# Altium PCB PCB1.PcbDoc
Units mm, origin at the board's own origin, x right, y up, seen from the top; angles counter-clockwise.
Board outline 49.6 x 17.59 mm, 4 copper layers (Top Layer, Layer 1, Layer 2, Bottom Layer), stack 0.127 mm thick; 1 components, 1 nets, 2 pads, 3 vias.
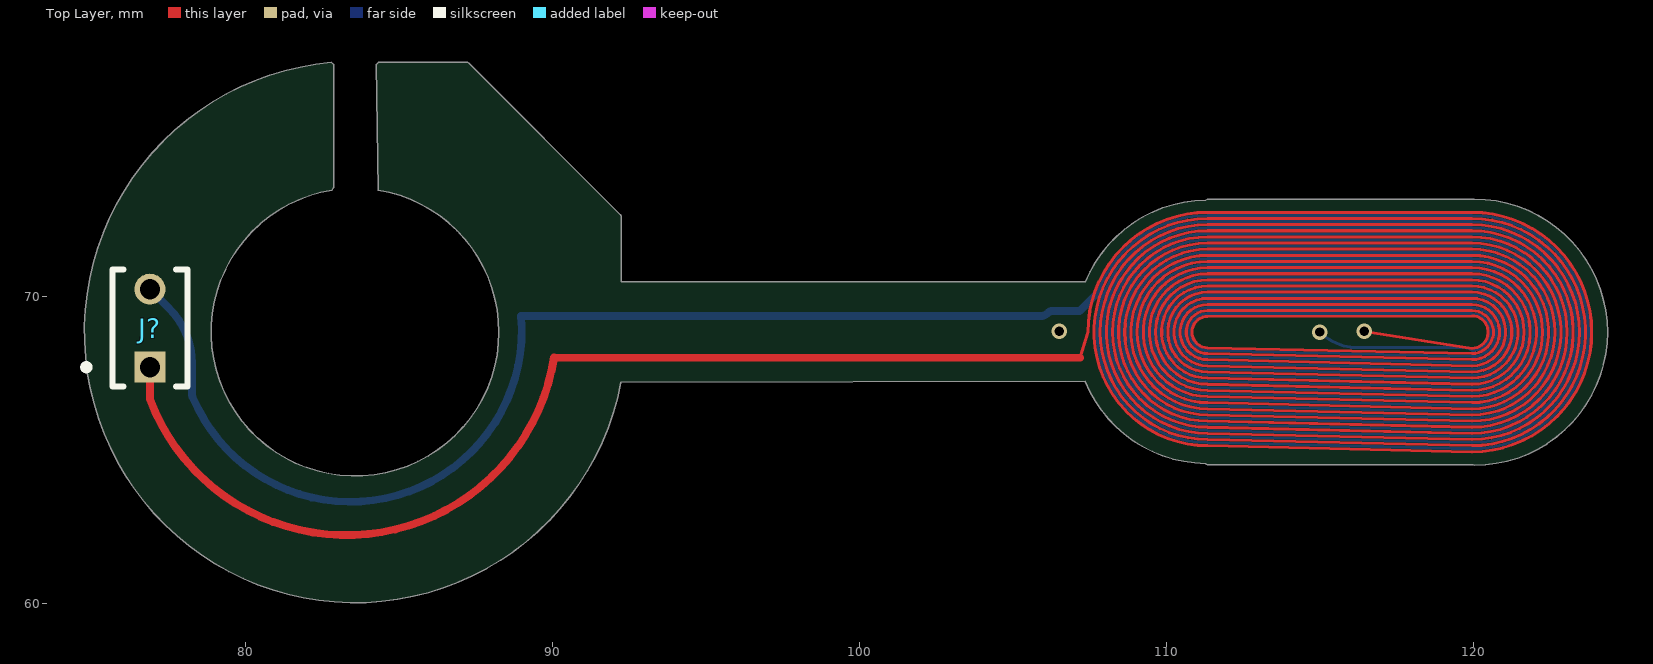
[diagram p0: Top Layer view]
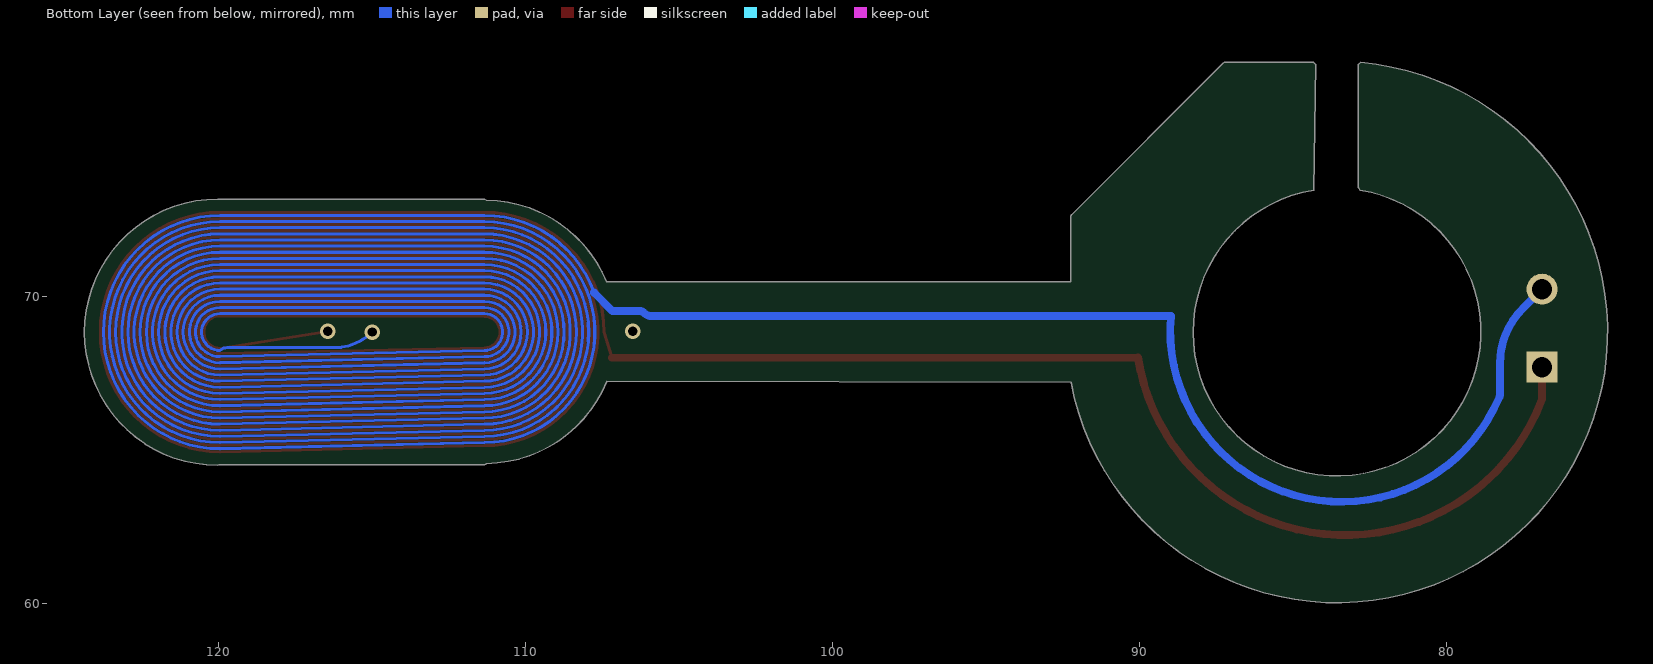
[diagram p1: Bottom Layer view, seen from below]
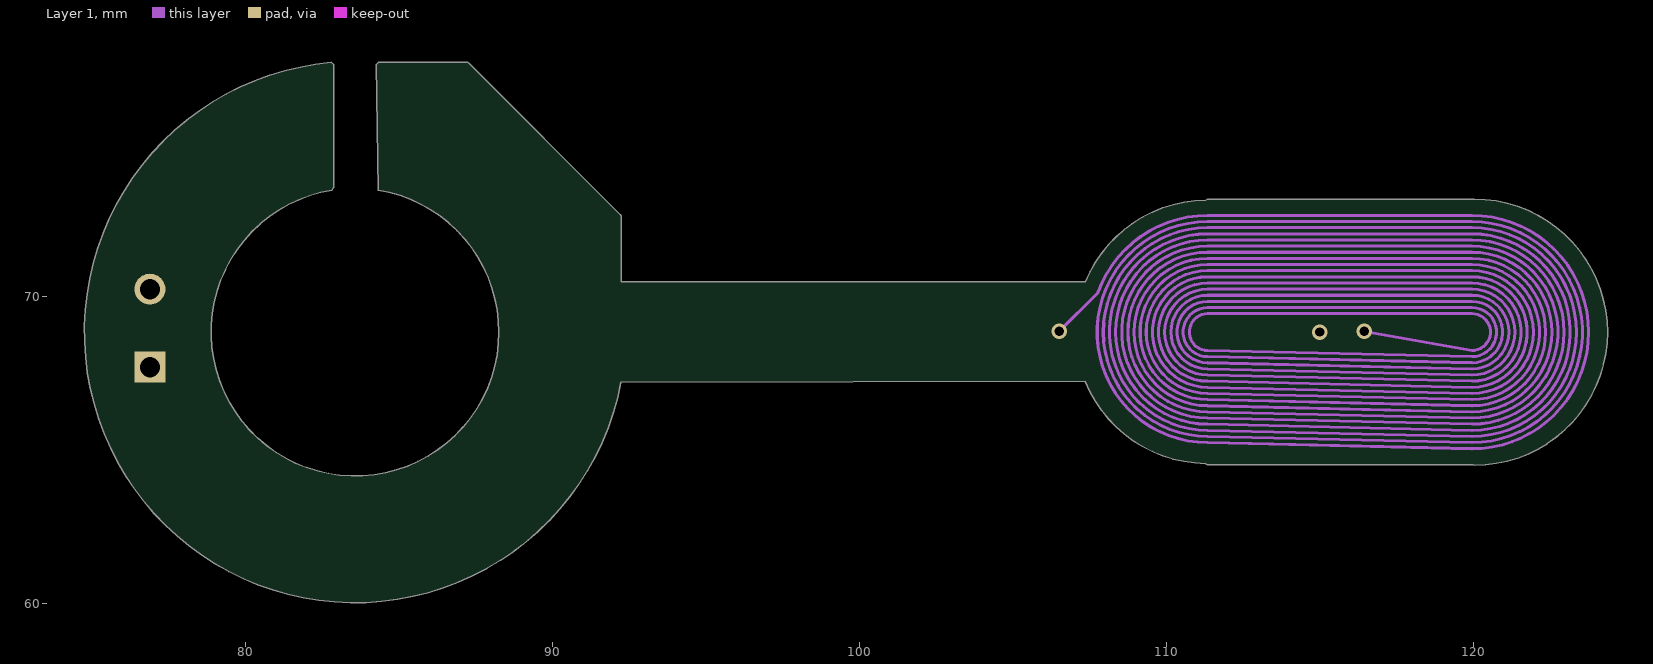
[diagram p2: Layer 1]
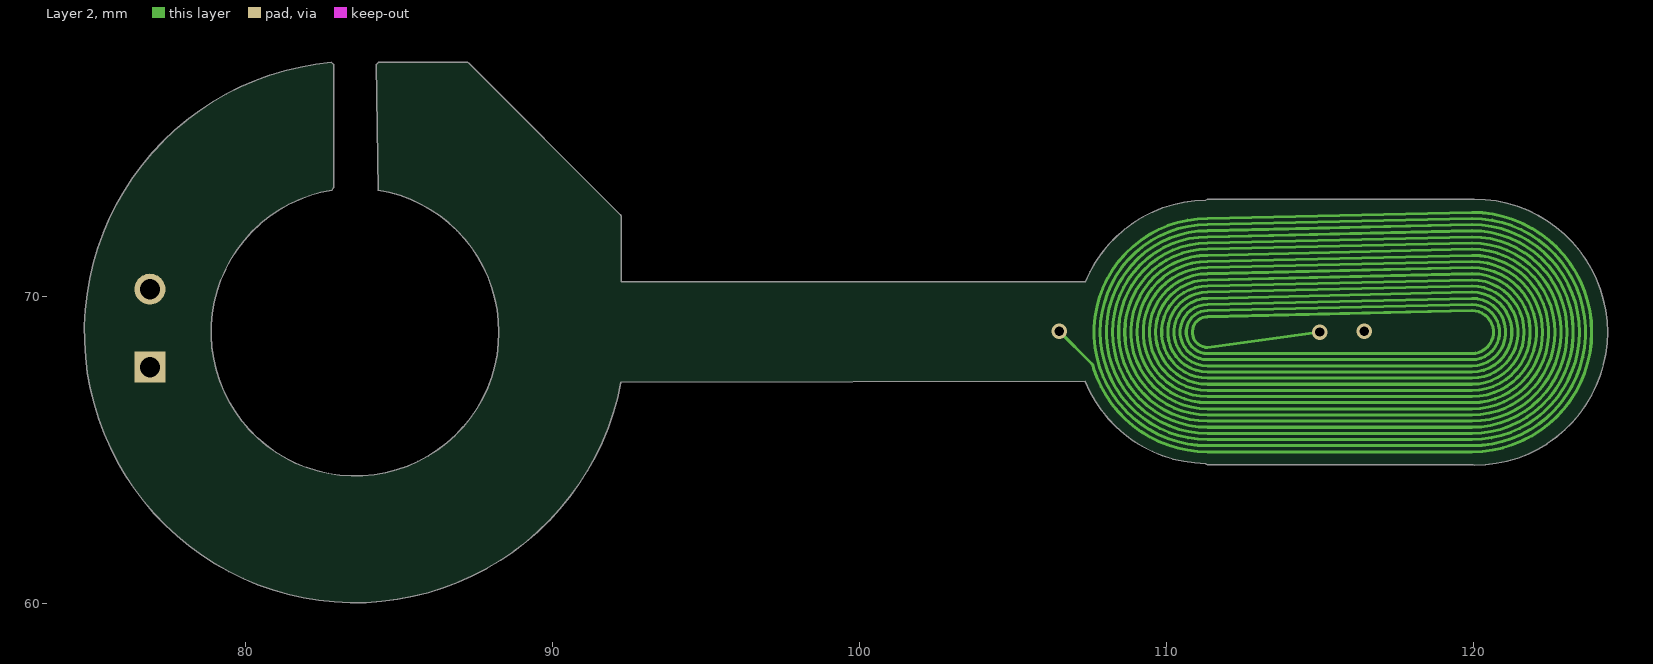
[diagram p3: Layer 2]

## Layer stack, top to bottom
Top Solder: solder mask 0.0102, Solder Resist, Dk 3.5
Top Layer: signal copper 0.0127
Dielectric 2: prepreg 0.0254, PP-006, Dk 3.5
Layer 1: signal copper 0.0127
Dielectric 1: dielectric 0.0254, FR-4, Dk 3.5
Layer 2: signal copper 0.0127
Dielectric 3: prepreg 0.0254, PP-006, Dk 3.5
Bottom Layer: signal copper 0.0127
Bottom Solder: solder mask 0.0102, Solder Resist, Dk 3.5

## Board outline
84.317,73.46 cw(c83.566,68.834) 88.252,68.834 cw(c83.566,68.834) 82.815,73.46 82.867,73.538 82.867,77.551 82.798,77.614 ccw(c83.566,68.834) 92.226,67.195 107.341,67.229 107.345,67.229 ccw(c111.328,68.851) 111.267,64.551 111.328,64.506 119.988,64.506 120.021,64.497 ccw(c120.021,68.831) 124.355,68.831 ccw(c120.021,68.831) 120.017,73.165 111.328,73.165 111.274,73.134 ccw(c111.328,68.834) 107.35,70.468 107.326,70.473 92.245,70.473 92.234,70.483 92.234,72.604 92.216,72.649 87.269,77.596 87.224,77.615 84.329,77.615 84.265,77.551

## Design rules (kind name [scope] priority, off if disabled: settings)
Clearance [All] p1: gap=0.254 ignorepadtopadclearanceinfootprint=FALSE except(0: Arc-Hole Track-Hole SMDPad-Hole THPad-Hole Via-Hole Fill-Hole Poly-Hole Region-Hole Text-Hole; 0.1: Arc-Arc Arc-Track Arc-Via Track-Track Track-Via)
PolygonConnect [All] p1: connectstyle=Relief reliefconductorwidth=0.254 reliefentries=4 polygonreliefangle="90 Angle" airgapwidth=0.254
RoutingVias [All] p1: holewidth=0.711 width=1.27 viastyle="Through Hole" minholewidth=0.711 minwidth=1.27 maxholewidth=0.711 maxwidth=1.27
SolderMaskExpansion [All] p1: expansion=0.102 istentingtop=FALSE
Width [All] p1: maxlimit=0.254 minlimit=0.1 preferedwidth=0.1 minimp=50.000000 maximp=50.000000 favimp=50.000000
30 further rules are at their usual default settings.

## Components (designator, comment, footprint, x,y, rotation, side; value= is the part's Value field where it differs from the comment)
J? "TMS-103-59-L-S-002" SAMTEC_TMS-103-59-L-S-002 76.886,68.961 r90 top

## Footprints (in the part's own frame and the unit in brackets; to place one, negate y for a bottom-side part, rotate by r counter-clockwise, add the part's x,y. Pads: shape width x height; smd on the part's side, far side on the other; paste and mask are expansions set on the pad)
SAMTEC_TMS-103-59-L-S-002 [mm]
  rect 1.01x1.01 hole 0.66: 01(-1.27,0)
  round 1.01 hole 0.66: 03(1.27,0)
  silkscreen extent -1.91,-1.22 1.91,2.17

## Part data
J?: Package=None, Availability=Unavailable, MP=TMS-103-59-L-S-002, Price=None

## Via types
v1: diameter 0.5/0.5/0.5/0.5 (per signal layer), hole 0.3, Top Layer to Bottom Layer, 3 vias

## Nets (pads, with @x,y where several pads share a name; then routed paths per layer and width w, separated by ;. In a path a pad name is that pad's centre, name@x,y a point inside that pad or via, vN(x,y) a via of type N, cw(c..) or ccw(c..) an arc to the next point about the centre after c; other vN are vias at no path point)
NetJ?_01: J?.01 J?.03 | length 2195.2
  Top Layer w0.1: 107.175,67.996 107.433,68.834 cw(c111.333,68.834) 111.333,72.734 119.939,72.734 cw(c119.939,68.834) 119.939,64.934 111.333,65.134 cw(c111.333,68.834) 111.333,72.534 119.939,72.534 cw(c119.939,68.834) 119.939,65.134 111.333,65.334 cw(c111.333,68.834) 111.333,72.334 119.939,72.334 cw(c119.939,68.834) 119.939,65.334 111.333,65.534 cw(c111.333,68.834) 111.333,72.134 119.939,72.134 cw(c119.939,68.834) 119.939,65.534 111.333,65.734 cw(c111.333,68.834) 111.333,71.934 119.939,71.934 cw(c119.939,68.834) 119.939,65.734 111.333,65.934 cw(c111.333,68.834) 111.333,71.734 119.939,71.734 cw(c119.939,68.834) 119.939,65.934 111.333,66.134 cw(c111.333,68.834) 111.333,71.534 119.939,71.534 cw(c119.939,68.834) 119.939,66.134 111.333,66.334 cw(c111.333,68.834) 111.333,71.334 119.939,71.334 cw(c119.939,68.834) 119.939,66.334 111.333,66.534 cw(c111.333,68.834) 111.333,71.134 119.939,71.134 cw(c119.939,68.834) 119.939,66.534 111.333,66.734 cw(c111.333,68.834) 111.333,70.934 119.939,70.934 cw(c119.939,68.834) 119.939,66.734 111.333,66.934 cw(c111.333,68.834) 111.333,70.734 119.939,70.734 cw(c119.939,68.834) 119.939,66.934 111.333,67.134 cw(c111.333,68.834) 111.333,70.534 119.939,70.534 cw(c119.939,68.834) 119.939,67.134 111.333,67.334 cw(c111.333,68.834) 111.333,70.334 119.939,70.334 cw(c119.939,68.834) 119.939,67.334 111.333,67.534 cw(c111.333,68.834) 111.333,70.134 119.939,70.134 cw(c119.939,68.834) 119.939,67.534 111.333,67.734 cw(c111.333,68.834) 111.333,69.934 119.939,69.934 cw(c119.939,68.834) 119.939,67.734 111.333,67.934 cw(c111.333,68.834) 111.333,69.734 119.939,69.734 cw(c119.939,68.834) 119.939,67.934 111.333,68.134 cw(c111.333,68.834) 111.333,69.534 119.939,69.534 ; v1(116.434,68.859) 119.939,68.304 ccw(c119.939,68.834) 119.939,69.364 111.333,69.347 ccw(c111.333,68.834) 111.333,68.321 119.939,68.134 ccw(c119.939,68.834) 119.939,69.534 ; 119.939,69.537 119.939,69.534
  Top Layer w0.254: J?.01 76.886,66.648 ccw(c83.287,69.063) 90.046,68.007 ; 90.116,67.996 107.175,67.996
  Layer 1 w0.1: v1(106.502,68.859) 107.752,70.109 ccw(c107.728,70.134) 107.762,70.134 cw(c111.333,68.834) 111.333,72.634 119.939,72.634 cw(c119.939,68.834) 119.939,65.034 111.333,65.234 cw(c111.333,68.834) 111.333,72.434 119.939,72.434 cw(c119.939,68.834) 119.939,65.234 111.333,65.434 cw(c111.333,68.834) 111.333,72.234 119.939,72.234 cw(c119.939,68.834) 119.939,65.434 111.333,65.634 cw(c111.333,68.834) 111.333,72.034 119.939,72.034 cw(c119.939,68.834) 119.939,65.634 111.333,65.834 cw(c111.333,68.834) 111.333,71.834 119.939,71.834 cw(c119.939,68.834) 119.939,65.834 111.333,66.034 cw(c111.333,68.834) 111.333,71.634 119.939,71.634 cw(c119.939,68.834) 119.939,66.034 111.333,66.234 cw(c111.333,68.834) 111.333,71.434 119.939,71.434 cw(c119.939,68.834) 119.939,66.234 111.333,66.434 cw(c111.333,68.834) 111.333,71.234 119.939,71.234 cw(c119.939,68.834) 119.939,66.434 111.333,66.634 cw(c111.333,68.834) 111.333,71.034 119.939,71.034 cw(c119.939,68.834) 119.939,66.634 111.333,66.834 cw(c111.333,68.834) 111.333,70.834 119.939,70.834 cw(c119.939,68.834) 119.939,66.834 111.333,67.034 cw(c111.333,68.834) 111.333,70.634 119.939,70.634 cw(c119.939,68.834) 119.939,67.034 111.333,67.234 cw(c111.333,68.834) 111.333,70.434 119.939,70.434 cw(c119.939,68.834) 119.939,67.234 111.333,67.434 cw(c111.333,68.834) 111.333,70.234 119.939,70.234 cw(c119.939,68.834) 119.939,67.434 111.333,67.634 cw(c111.333,68.834) 111.333,70.034 119.939,70.034 cw(c119.939,68.834) 119.939,67.634 111.333,67.834 cw(c111.333,68.834) 111.333,69.834 119.939,69.834 cw(c119.939,68.834) 119.939,67.834 111.333,68.034 cw(c111.333,68.834) 111.333,69.634 119.939,69.634 cw(c119.939,68.834) 119.939,68.034 111.333,68.234 cw(c111.333,68.834) 111.333,69.434 119.939,69.434 cw(c119.939,68.834) 119.939,68.234 v1(116.434,68.859)
  Layer 2 w0.1: v1(106.502,68.859) 107.551,67.81 cw(c107.399,67.658) 107.615,67.658 ccw(c111.333,68.834) 111.333,64.934 119.939,64.934 ccw(c119.939,68.834) 119.939,72.734 111.333,72.534 ccw(c111.333,68.834) 111.333,65.134 119.939,65.134 ccw(c119.939,68.834) 119.939,72.534 111.333,72.334 ccw(c111.333,68.834) 111.333,65.334 119.939,65.334 ccw(c119.939,68.834) 119.939,72.334 111.333,72.134 ccw(c111.333,68.834) 111.333,65.534 119.939,65.534 ccw(c119.939,68.834) 119.939,72.134 111.333,71.934 ccw(c111.333,68.834) 111.333,65.734 119.939,65.734 ccw(c119.939,68.834) 119.939,71.934 111.333,71.734 ccw(c111.333,68.834) 111.333,65.934 119.939,65.934 ccw(c119.939,68.834) 119.939,71.734 111.333,71.534 ccw(c111.333,68.834) 111.333,66.134 119.939,66.134 ccw(c119.939,68.834) 119.939,71.534 111.333,71.334 ccw(c111.333,68.834) 111.333,66.334 119.939,66.334 ccw(c119.939,68.834) 119.939,71.334 111.333,71.134 ccw(c111.333,68.834) 111.333,66.534 119.939,66.534 ccw(c119.939,68.834) 119.939,71.134 111.333,70.934 ccw(c111.333,68.834) 111.333,66.734 119.939,66.734 ccw(c119.939,68.834) 119.939,70.934 111.333,70.734 ccw(c111.333,68.834) 111.333,66.934 119.939,66.934 ccw(c119.939,68.834) 119.939,70.734 111.333,70.534 ccw(c111.333,68.834) 111.333,67.134 119.939,67.134 ccw(c119.939,68.834) 119.939,70.534 111.333,70.334 ccw(c111.333,68.834) 111.333,67.334 119.939,67.334 ccw(c119.939,68.834) 119.939,70.334 111.333,70.134 ccw(c111.333,68.834) 111.333,67.534 119.939,67.534 ccw(c119.939,68.834) 119.939,70.134 111.333,69.934 ccw(c111.333,68.834) 111.333,67.734 119.939,67.734 ccw(c119.939,68.834) 119.939,69.934 111.333,69.734 ccw(c111.333,68.834) 111.333,67.934 119.939,67.934 ccw(c119.939,68.834) 119.939,69.734 111.333,69.534 ccw(c111.333,68.834) 111.333,68.134 119.939,68.134 ccw(c119.939,68.834) 119.939,69.534 111.333,69.334 ccw(c111.333,68.834) 111.333,68.334 v1(114.986,68.834)
  Bottom Layer w0.1: 107.762,70.134 cw(c111.333,68.834) 111.333,72.634 119.939,72.634 cw(c119.939,68.834) 119.939,65.034 111.333,65.234 cw(c111.333,68.834) 111.333,72.434 119.939,72.434 cw(c119.939,68.834) 119.939,65.234 111.333,65.434 cw(c111.333,68.834) 111.333,72.234 119.939,72.234 cw(c119.939,68.834) 119.939,65.434 111.333,65.634 cw(c111.333,68.834) 111.333,72.034 119.939,72.034 cw(c119.939,68.834) 119.939,65.634 111.333,65.834 cw(c111.333,68.834) 111.333,71.834 119.939,71.834 cw(c119.939,68.834) 119.939,65.834 111.333,66.034 cw(c111.333,68.834) 111.333,71.634 119.939,71.634 cw(c119.939,68.834) 119.939,66.034 111.333,66.234 cw(c111.333,68.834) 111.333,71.434 119.939,71.434 cw(c119.939,68.834) 119.939,66.234 111.333,66.434 cw(c111.333,68.834) 111.333,71.234 119.939,71.234 cw(c119.939,68.834) 119.939,66.434 111.333,66.634 cw(c111.333,68.834) 111.333,71.034 119.939,71.034 cw(c119.939,68.834) 119.939,66.634 111.333,66.834 cw(c111.333,68.834) 111.333,70.834 119.939,70.834 cw(c119.939,68.834) 119.939,66.834 111.333,67.034 cw(c111.333,68.834) 111.333,70.634 119.939,70.634 cw(c119.939,68.834) 119.939,67.034 111.333,67.234 cw(c111.333,68.834) 111.333,70.434 119.939,70.434 cw(c119.939,68.834) 119.939,67.234 111.333,67.434 cw(c111.333,68.834) 111.333,70.234 119.939,70.234 cw(c119.939,68.834) 119.939,67.434 111.333,67.634 cw(c111.333,68.834) 111.333,70.034 119.939,70.034 cw(c119.939,68.834) 119.939,67.634 111.333,67.834 cw(c111.333,68.834) 111.333,69.834 119.939,69.834 cw(c119.939,68.834) 119.939,67.834 111.333,68.034 cw(c111.333,68.834) 111.333,69.634 119.939,69.634 cw(c119.939,68.834) 119.939,68.034 111.333,68.234 cw(c111.333,68.834) 111.333,69.434 119.939,69.434 cw(c119.939,68.834) 119.939,68.234 ccw(c119.717,68.012) 119.717,68.326 116.212,68.326 cw(c116.212,70.06) v1(114.986,68.834)
  Bottom Layer w0.254: J?.03 77.513,69.603 cw(c75.717,67.807) 78.257,67.807 78.257,66.812 ccw(c78.511,66.814) 78.277,66.717 ccw(c83.417,68.884) 88.975,69.355 105.872,69.355 ccw(c105.872,69.743) 106.147,69.469 cw(c106.269,69.346) 106.269,69.52 107.163,69.52 107.752,70.109 ccw(c107.728,70.134) 107.762,70.134

## Silkscreen, mask and mechanical layers (free items; w line width, h text height)
Mechanical 1:
  lines w0.1: 107.373,70.39 cw(c111.328,68.834) 111.328,73.084 ; 107.374,67.293 ccw(c111.328,68.851) 111.328,64.601
  lines w0.127: 82.803,73.534 82.803,77.551 ccw(c83.566,68.834) 92.171,67.245 ; 82.805,73.523 ccw(c83.566,68.834) 84.327,73.523 ; 84.329,73.534 84.329,77.551 87.224,77.551 89.753,75.021 92.171,72.604 92.171,70.483 92.245,70.409 107.326,70.409 ; 92.183,67.259 107.341,67.292 ; 111.328,64.57 120.021,64.57 ; 111.328,73.101 120.018,73.101 cw(c120.021,68.831) 120.021,64.561